# Altium PCB PCB_MAIN.PcbDoc (part 2 of 2)
Units mil, origin at the board's own origin, x right, y up, seen from the top; angles counter-clockwise.
Board outline 5905.51 x 3937.01 mil, 2 copper layers (Top Layer, Bottom Layer); 33 components, 21 nets, 167 pads, 0 vias.
Unrouted connection lines stored in the file: 6.
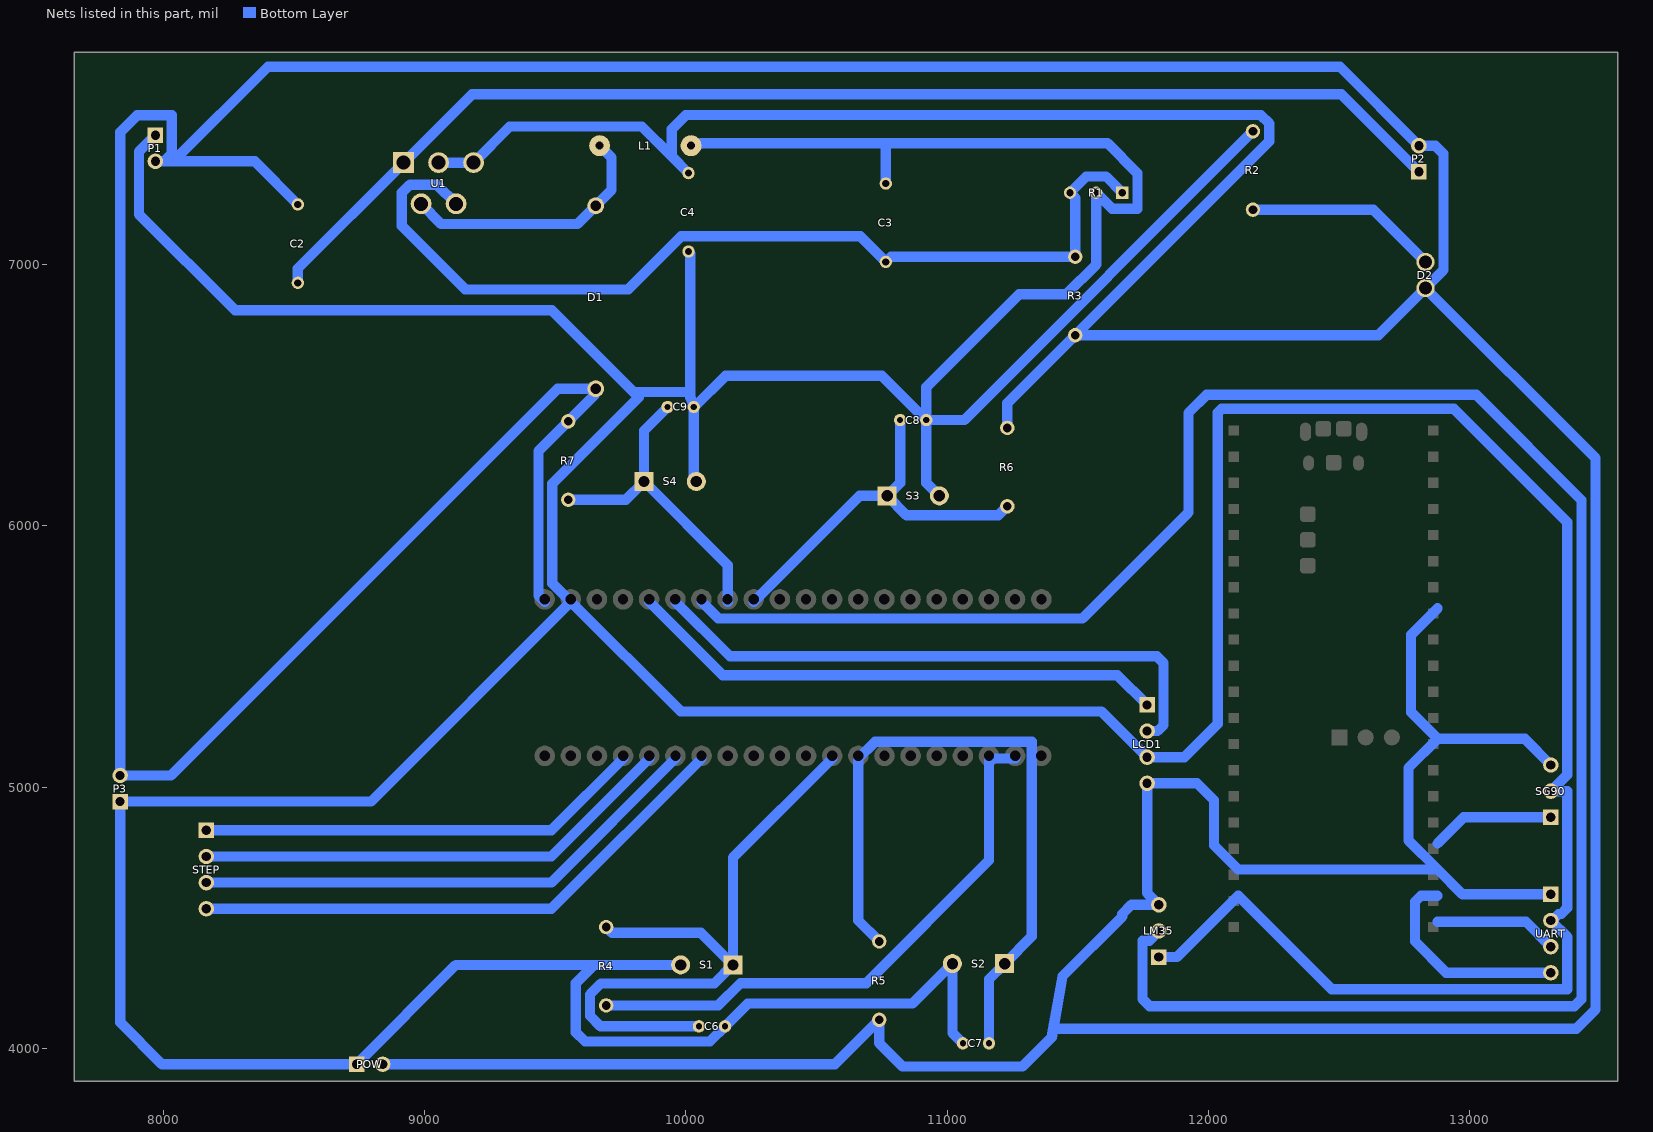
[diagram p2: the nets of this part, all layers, seen from the top]

## Part data
C2 C3 C4: "Capacitor", LatestRevisionDate=17-Jul-2002, LatestRevisionNote="Re-released for DXP Platform.", PackageDescription="Radial Cap, Thru-Hole; 2 Leads; 0.3 in Pin Spacing", PackageReference=RAD-0.3, Published=8-Jun-2000, Publisher="Altium Limited"
C6 C7 C8 C9: library part "TU_GOM_MH(0,047 µF--220pF)_MH", "Capacitor", LatestRevisionDate=17-Jul-2002, LatestRevisionNote="Re-released for DXP Platform.", PackageReference=RAD-0.3, Published=8-Jun-2000, Publisher="Altium Limited"
D1: "Zener Diode", LatestRevisionDate=17-Jul-2002, LatestRevisionNote="Re-released for DXP Platform.", PackageDescription="Diode, Thru-Hole; 2 Leads; 0.7 in Pin Spacing", PackageReference=DIODE-0.7, Published=8-Jun-2000, Publisher="Altium Limited"
D2: "Typical INFRARED GaAs LED", LatestRevisionDate=08-Jul-2005, LatestRevisionNote="Mech Layer 1 removed.", PackageDescription="LED; 2 Leads", PackageReference=LED-0, Published=8-Jun-2000, Publisher="Altium Limited"
L1: library part L1, "Inductor"
LCD1 STEP UART: "Header, 4-Pin", LatestRevisionDate=17-Jul-2002, LatestRevisionNote="Re-released for DXP Platform.", Publisher="Altium Limited"
LM35 SG90: "Header, 3-Pin", LatestRevisionDate=17-Jul-2002, LatestRevisionNote="Re-released for DXP Platform.", Publisher="Altium Limited"
P1 P2 P3 POW: "Header, 2-Pin", LatestRevisionDate=17-Jul-2002, LatestRevisionNote="Re-released for DXP Platform.", Publisher="Altium Limited"
R1: "Potentiometer", LatestRevisionDate=17-Jul-2002, LatestRevisionNote="Re-released for DXP Platform.", PackageDescription="Variable Resistor, Thru-Hole; 3 Leads", PackageReference=VR5, Published=8-Jun-2000, Publisher="Altium Limited", Set Position=0.5, Sim Note="Enter the Resistance value and the set point into parameter fields."
R2 R3 R4 R5 R6 R7: "Resistor", LatestRevisionDate=17-Jul-2002, LatestRevisionNote="Re-released for DXP Platform.", PackageDescription="Axial Device, Thru-Hole; 2 Leads; 0.3 in Pin Spacing", PackageReference=AXIAL-0.3, Published=8-Jun-2000, Publisher="Altium Limited"
S1 S2 S3 S4: "Single-Pole, Single-Throw Switch", LatestRevisionDate=17-Jul-2002, LatestRevisionNote="Re-released for DXP Platform.", PackageDescription="Switch; 2 Leads", PackageReference=SPST-2, Published=24-Mar-1999, Publisher="Altium Limited"
U1: "SIMPLE SWITCHER&reg; 4.5V to 40V, 3A Low Component Count Step-Down Regulator 5-TO-220 -40 to 125", Package="TO-220-5 Texas Instruments", Check_prices=https://www.snapeda.com/parts/LM2596T-ADJ/Texas+Instruments/view-part/?ref=eda, MF="Texas Instruments", MP=LM2596T-ADJ, SnapEDA_Link=https://www.snapeda.com/parts/LM2596T-ADJ/Texas+Instruments/view-part/?ref=snap

## Nets (pads, with @x,y where several pads share a name; then routed paths per layer and width w, separated by ;. In a path a pad name is that pad's centre, name@x,y a point inside that pad or via, vN(x,y) a via of type N, cw(c..) or ccw(c..) an arc to the next point about the centre after c; other vN are vias at no path point)
GND: C2.1 C4.1 D1.1 D2.2 LCD1.4 LM35.3 P1.2 P2.2 P3.2 POW.2 R3.1 R4.1 R5.1 R6.1 R7.1 SG90.3 U1.3 U1.5 UART.1 | length 33830
  Bottom Layer w39.37: P1.2@7970,7395 8003,7395 ; C2.1@8515,7230 8350,7395 8039,7395 ; POW.2@8840,3940 10570,3940 R5.1@10740,4110 10740,4021 10830,3931 11288,3931 11400.16,4043.16 11405.94,4076 ; U1.3@9053.86,7390 U1.5@9187.72,7390 9326.18,7528.47 9831.53,7528.47 9946,7414 ; 9460,5710 9435.83,5734.17 9435.83,6285.83 R7.1@9550,6400 9650.1,6500.1 9650.1,6520.1 D1.1@9655,6525 9510,6525 8030,5045 P3.2@7835,5045 7835,7506 7900,7571 8033,7571 8033,7425 8003,7395 ; R4.1@9695,4165 10124,4165 10209,4250 10690,4250 11160,4720 11160,5110 11260,5110 ; C4.1@10010,7350 9946,7414 ; R6.1@11230,6375 11230,6470 R3.1@11490,6730 ; 11670,4505 11441.14,4276.14 11405.94,4076 ; 11670,4515 11705,4550 LM35.3@11810,4550 11765,4595 LCD1.4@11765,5015 11956,5015 12021,4950 12021,4777.5 12113.5,4685 12876.5,4685 ; 12876.5,5685 12775,5583.5 12775,5286.5 12876.5,5185 ; UART.1@13310,4590 12971.5,4590 12876.5,4685 ; SG90.3@13310,5085 13210,5185 12876.5,5185 ; 8003,7395 8039,7395 ; 8039,7395 8401,7757 12503,7757 P2.2@12805,7455 12868,7455 12899,7424 12899,6979 D2.2@12830,6910 ; 9946,7414 9946,7518 10000,7572 12200,7572 12232,7540 12232,7472 R3.1@11490,6730 ; 11405.94,4076 13407,4076 13481,4150 13481,6259 D2.2@12830,6910 ; R3.1@11490,6730 12650,6730 D2.2@12830,6910 ; 12876.5,4685 12765,4796.5 12765,5073.5 12876.5,5185
NetC2_2: C2.2 P2.1 U1.1 | length 4744.3
  Bottom Layer w39.37: C2.2@8515,6930 8515,6985 U1.1@8920,7390 9182,7652 12508,7652 P2.1@12805,7355
NetC3_1: C3.1 R1.1 R1.3 R3.2 U1.4 | length 3693.3
  Bottom Layer w39.37: U1.4@9120.79,7232.52 9047.31,7306 8944,7306 8913,7275 8913,7148 9156,6905 9779,6905 9982,7108 10667,7108 C3.1@10765,7010 10785,7030 R3.2@11490,7030 11490,7255 R1.3@11470,7275 11532,7337 11608,7337 R1.1@11670,7275
NetC3_2: C3.2 C4.2 L1.2 P1.1 R1.2 R2.2
NetC6_1: C6.1 R4.2 S1.1 | length 2601.8
  Bottom Layer w39.37: R4.2@9695,4465 9716.97,4443.03 10056.97,4443.03 S1.1@10180,4320 ; C6.1@10050,4085 9673,4085 9633,4125 9633,4207 9675,4249 10109,4249 S1.1@10180,4320 ; 10560,5110 10180,4730 S1.1@10180,4320
NetC6_2: C6.2 C7.2 C8.2 C9.2 LCD1.3 LM35.1 P3.1 POW.1 S1.2 S2.2 S3.2 S4.2 SG90.2 UART.2 | length 27769.2
  Bottom Layer w39.37: 7970,7495 7907,7432 7907,7193 8275,6825 9487,6825 9799.91,6512.09 ; S1.2@9980,4320 9649,4320 ; 10010,7050 10017.24,7042.76 10017.24,6512.09 ; 10020,7455 10027.77,7462.77 10056.5,7462.77 10058.08,7464.35 10765,7464.35 ; S4.2@10040,6170 10040,6179.06 10030,6189.06 C9.2@10030,6455 ; 10765,7310 10765,7464.35 ; S3.2@10970,6115 10920,6165 C8.2@10920,6405 ; C7.2@11060,4020 11020,4060 S2.2@11020,4325 10867,4172 10237,4172 C6.2@10150,4085 10092,4027 9614.5,4027 9579,4062.5 9579,4250 9649,4320 ; LM35.1@11810,4350 11878.5,4350 12113.5,4585 12471.5,4227 13373,4227 13373,4427 UART.2@13310,4490 13315.33,4490 13340.33,4515 13349.94,4515 13373,4538.06 13373,4985 SG90.2@13310,4985 13373,5048 13373,6013.99 12939,6447.99 12050.51,6447.99 12035,6432.48 12035,5243 11907,5115 LCD1.3@11765,5115 11590,5290 9980,5290 9560,5710 ; 12170,7510 11065,6405 C8.2@10920,6405 ; 9560,5710 8795,4945 P3.1@7835,4945 7835,4100 7995,3940 POW.1@8740,3940 9120,4320 9649,4320 ; 9560,5710 9488.98,5781.02 9488.98,6161 9819.99,6492.01 9799.91,6512.09 ; 9799.91,6512.09 10017.24,6512.09 ; 10017.24,6512.09 10017.24,6492.01 C9.2@10030,6455 ; C9.2@10030,6455 10032,6455 10152,6575 10750,6575 C8.2@10920,6405 ; 10765,7464.35 11613.65,7464.35 11728,7350 11728,7214 11631,7214 11570,7275 11570,7000 11456,6886 11276,6886 10920,6530 C8.2@10920,6405
NetC7_1: C7.1 R5.2 S2.1 | length 2645.6
  Bottom Layer w39.37: R5.2@10740,4410 10660,4490 10660,5110 10724,5174 11324,5174 11324,4429 S2.1@11220,4325 11160,4265 C7.1@11160,4020
NetC8_1: C8.1 R6.2 S3.1 | length 1493.2
  Bottom Layer w39.37: 10260,5710 10665,6115 S3.1@10770,6115 ; C8.1@10820,6405 10820,6165 S3.1@10770,6115 ; R6.2@11230,6075 11196,6041 10844,6041 S3.1@10770,6115
NetC9_1: C9.1 R7.2 S4.1 | length 1233.8
  Bottom Layer w39.37: R7.2@9550,6100 9770,6100 S4.1@9840,6170 ; C9.1@9930,6455 9840,6365 S4.1@9840,6170 ; 10160,5710 10160,5850 S4.1@9840,6170
NetD1_2: D1.2 L1.1 U1.2 | length 1003.2
  Bottom Layer w39.37: U1.2@8986.93,7232.52 9064.45,7155 9585,7155 D1.2@9655,7225 9715.65,7285.65 9715.65,7409.35 L1.1@9670,7455
NetD2_1: D2.1 R2.1 | length 742.8
  Bottom Layer w39.37: R2.1@12170,7210 12630,7210 D2.1@12830,7010
NetLCD1_1: LCD1.1 | length 2068.6
  Bottom Layer w39.37: 9860,5710 10141,5429 11651,5429 LCD1.1@11765,5315
NetLCD1_2: LCD1.2 | length 2274.9
  Bottom Layer w39.37: 9960,5710 10169,5501 11802,5501 11828,5475 11828,5238 11805,5215 LCD1.2@11765,5215
NetLM35_2: LM35.2 | length 8052.3
  Bottom Layer w39.37: 10060,5710 10124,5646 11518,5646 11923,6051 11923,6432 11993,6502 13024,6502 13427,6099 13427,4189 13400,4162 11775,4162 11747,4190 11747,4413 11773,4413 LM35.2@11810,4450
NetP4_1: UART.3 | length 472.9
  Bottom Layer w39.37: 12876.5,4485 13215,4485 UART.3@13310,4390
NetP4_2: UART.4 | length 817.7
  Bottom Layer w39.37: 12876.5,4585 12813.06,4585 12790,4561.94 12790,4410 12910,4290 UART.4@13310,4290
NetP4_4: SG90.1 | length 474.9
  Bottom Layer w39.37: 12876.5,4785 12976.5,4885 SG90.1@13310,4885
NetSTEP_1: STEP.1 | length 1708.9
  Bottom Layer w39.37: STEP.1@8165,4835 9485,4835 9760,5110
NetSTEP_2: STEP.2 | length 1850.3
  Bottom Layer w39.37: STEP.2@8165,4735 9485,4735 9860,5110
NetSTEP_3: STEP.3 | length 1991.8
  Bottom Layer w39.37: STEP.3@8165,4635 9485,4635 9960,5110
NetSTEP_4: STEP.4 | length 2133.2
  Bottom Layer w39.37: STEP.4@8165,4535 9485,4535 10060,5110
pads on no net: Designator5.1 Designator5.2 Designator5.3 Designator5.4 Designator5.5 Designator5.6 Designator5.7 Designator5.8 Designator5.9 Designator5.10 Designator5.11 Designator5.12 Designator5.13 Designator5.14 Designator5.15 Designator5.16 Designator5.17 Designator5.18 Designator5.19 Designator5.20 Designator5.21 Designator5.22 Designator5.23 Designator5.24 Designator5.25 Designator5.26 Designator5.27 Designator5.28 Designator5.29 Designator5.30 Designator5.31 Designator5.32 Designator5.33 Designator5.34 Designator5.35 Designator5.36 Designator5.37 Designator5.38 Designator5.39 Designator5.40 Designator5.A Designator5.B Designator5.C Designator5.D Designator5.E Designator5.F Designator5.G Designator5.TP1 Designator5.TP2 Designator5.TP3 Designator5.TP4 Designator5.TP5 Designator5.TP6 Designator6.1 Designator6.2 Designator6.3 Designator6.4 Designator6.5 Designator6.6 Designator6.7 Designator6.8 Designator6.9 Designator6.10 Designator6.11 Designator6.12 Designator6.13 Designator6.14 Designator6.15 Designator6.16 Designator6.17 Designator6.18 Designator6.19 Designator6.20 Designator6.21 Designator6.22 Designator6.23 Designator6.24 Designator6.25 Designator6.26 Designator6.27 Designator6.28 Designator6.29 Designator6.30 Designator6.31 Designator6.32 Designator6.33 Designator6.34 Designator6.35 Designator6.36 Designator6.37 Designator6.38 Designator6.39 Designator6.40
copper on no net: | length 19685
  Top Layer w10: 7660,3875 13565.51,3875 13565.51,7812.01 7660,7812.01 7660,3875

## Other copper
Bottom Layer:
  text "MO HINH PHAN LOAI SAN PHAM" at 11885,8110 h60
  text "SU DUNG OPEN CV" at 11630,7925 h60

## Text inside footprints (layer, text, board x,y; h text height)
Designator6: Top Overlay "5V" at 9683.3,5568 h70 r90; Top Overlay "B9" at 9778.3,5568 h70 r90; Top Overlay "B8" at 9878.3,5573 h70 r90; Top Overlay "3.3V" at 9478.3,5553 h70 r90; Top Overlay "GND" at 9577.3,5530.8 h70 r90; Top Overlay "A5" at 10388.3,5178 h70 r90; Top Overlay "A2" at 10087.07,5178 h70 r90; Top Overlay "A3" at 10187.3,5178 h70 r90; Top Overlay "A4" at 10289.07,5178 h70 r90; Top Overlay "RST" at 11088.3,5178 h70 r90; Top Overlay "B10" at 10886.3,5178 h70 r90; Top Overlay "B11" at 10988.07,5178 h70 r90; Top Overlay "A6" at 10486.3,5178 h70 r90; Top Overlay "A7" at 10588.07,5178 h70 r90; Top Overlay "B0" at 10688.3,5178 h70 r90; Top Overlay "B1" at 10789.07,5178 h70 r90; Top Overlay "3.3V" at 11185.3,5178 h70 r90; Top Overlay "B15" at 11084.3,5558.4 h70 r90; Top Overlay "A8" at 10983.3,5570.5 h70 r90; Top Overlay "A11" at 10685.07,5567.2 h70 r90; Top Overlay "B3" at 10384.3,5573 h70 r90; Top Overlay "A9" at 10882.3,5571.7 h70 r90; Top Overlay "A15" at 10482.3,5555.9 h70 r90; Top Overlay "A12" at 10584.07,5555.9 h70 r90; Top Overlay "A10" at 10784.3,5555.9 h70 r90; Top Overlay "VBAT" at 9483.07,5180.86 h70 r90; Top Overlay "B5" at 10183.3,5573 h70 r90; Top Overlay "B14" at 11182.07,5557.2 h70 r90; Top Overlay "B7" at 9985.07,5573 h70 r90; Top Overlay "B4" at 10285.07,5571.7 h70 r90; Top Overlay "B6" at 10082.3,5574.2 h70 r90; Top Overlay "C15" at 9781.3,5178 h70 r90; Top Overlay "C13" at 9582.3,5178 h70 r90; Top Overlay "C14" at 9680.3,5178 h70 r90; Top Overlay "A0" at 9882.3,5178 h70 r90; Top Overlay "A1" at 9983.07,5180.8 h70 r90; Top Overlay "GND" at 11283.3,5178 h70 r90; Top Overlay "B13" at 11283.3,5558 h70 r90; Top Overlay "GND" at 11384.3,5178 h70 r90; Top Overlay "B12" at 11382.07,5558.4 h70 r90